# Altium PCB PocketAnalyser_R00.PcbDoc
Units mil, origin at the board's own origin, x right, y up, seen from the top; angles counter-clockwise.
Board outline 2915 x 965 mil, 2 copper layers (Top Layer, Bottom Layer); 36 components, 19 nets, 188 pads, 371 vias.
Unrouted connection lines stored in the file: 1.
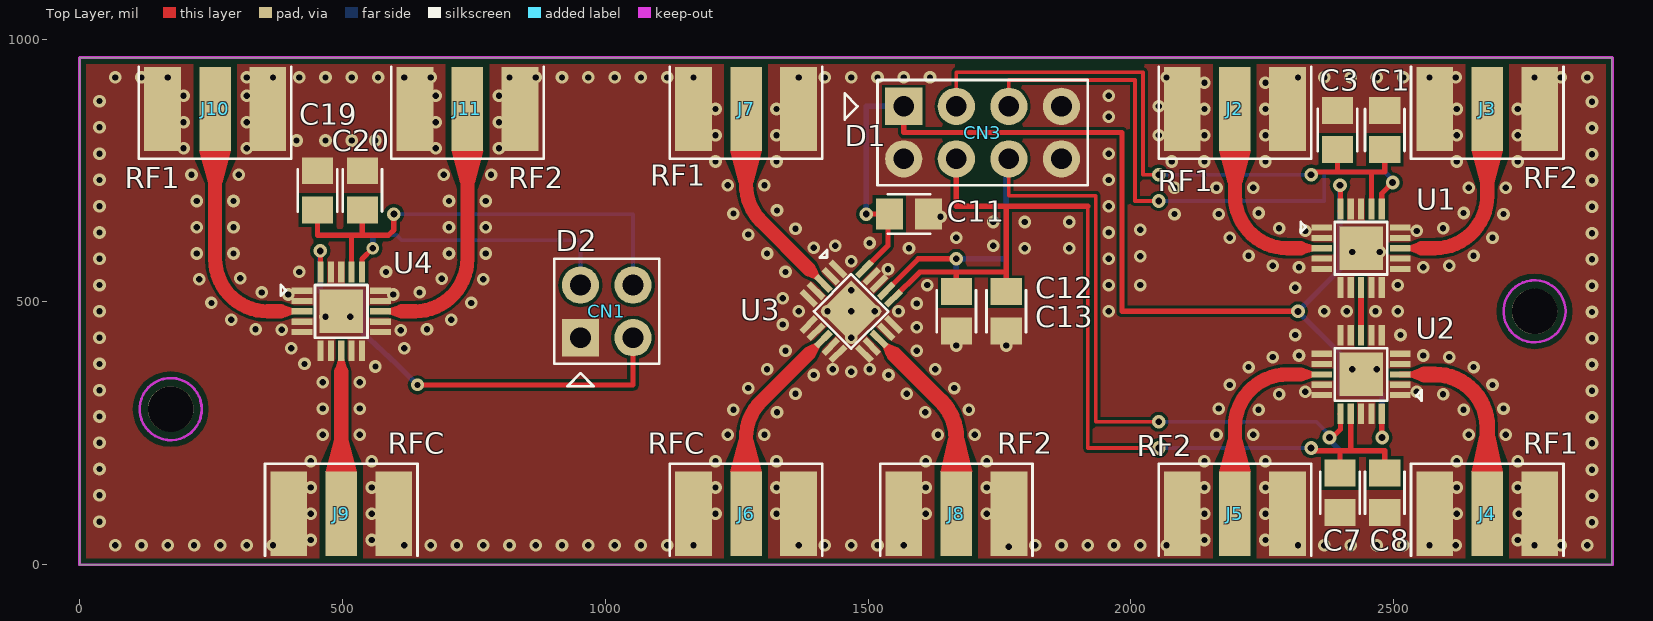
[diagram p0: Top Layer view]
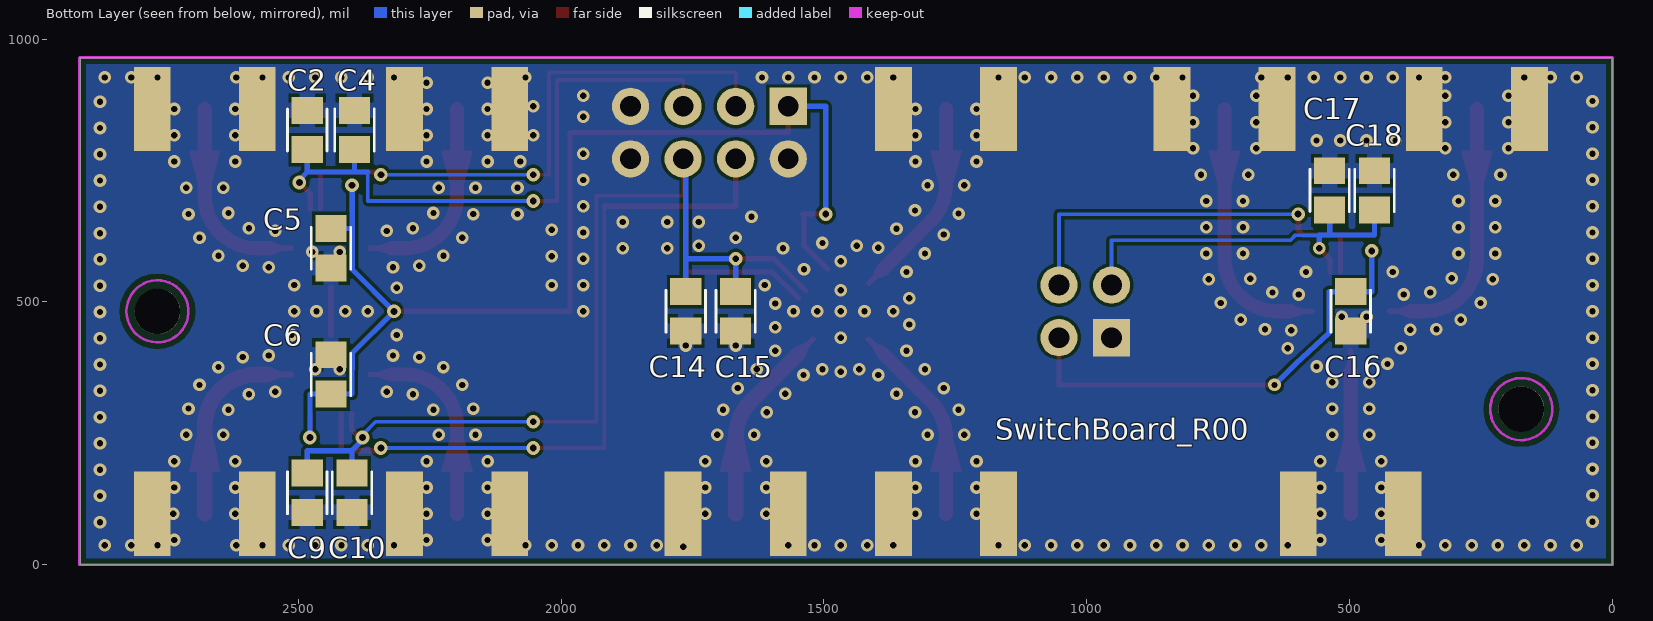
[diagram p1: Bottom Layer view, seen from below]
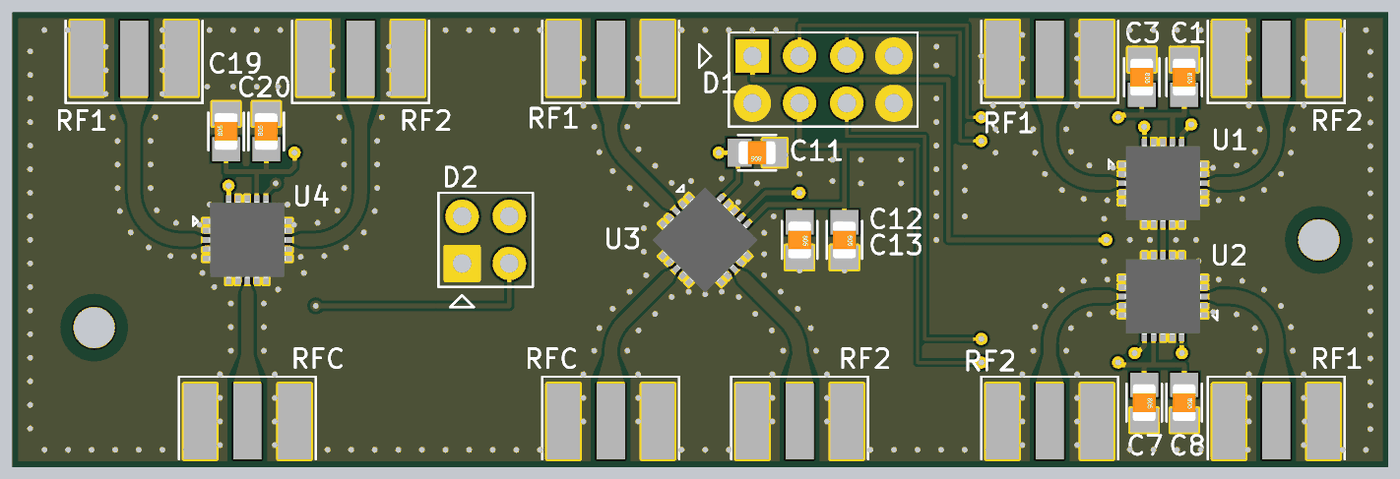
[diagram p2: 3D render of the assembled board from above, using the file's embedded part models]
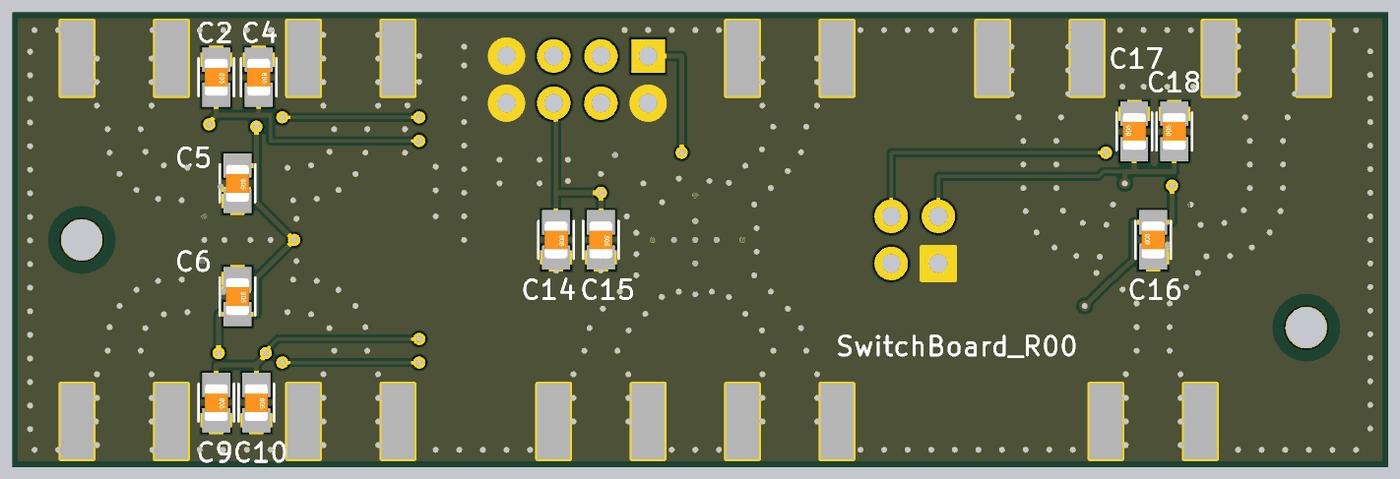
[diagram p3: 3D render of the assembled board from below, using the file's embedded part models]

## Layer stack, top to bottom
Top Solder: solder mask 0.4, Solder Resist, Dk 3.5
Top Layer: signal copper 1.4
Dielectric 1: dielectric 12.6, FR-4, Dk 4.8
Bottom Layer: signal copper 1.4
Bottom Solder: solder mask 0.4, Solder Resist, Dk 3.5

## Board outline
0,0 0,965 2915,965 2915,0

## Design rules (kind name [scope] priority, off if disabled: settings)
Clearance Clearance_3 [(HasFootprint('SMA_Connector') AND  Not InNet('GND'))] p1: gap=12 ignorepadtopadclearanceinfootprint=FALSE
Clearance TOPGND_RF_2 [InNamedPolygon('NONET_L01_P001')] p2: gap=6 ignorepadtopadclearanceinfootprint=FALSE
Clearance TOPGND_RF_1 [InNamedPolygon('NONET_L01_P001')] p3: gap=6 ignorepadtopadclearanceinfootprint=FALSE
Clearance Clearance_1 [InNamedPolygon('NONET_L01_P001')] p4: gap=6 ignorepadtopadclearanceinfootprint=FALSE
Clearance Clearance_1 [OnMid vs OnMid] p5: gap=6 ignorepadtopadclearanceinfootprint=FALSE sourcerule=43 cellrowname=All cellrowtype=0 cellcolname=All cellcoltype=0 innerlayers=TRUE
Clearance Clearance_2 [(ExistsOnLayer('Top Layer') Or ExistsOnLayer('Bottom Layer')) vs (ExistsOnLayer('Top Layer') Or ExistsOnLayer('Bottom Layer'))] p6: gap=6 ignorepadtopadclearanceinfootprint=FALSE sourcerule=43 cellrowname=All cellrowtype=0 cellcolname=All cellcoltype=0 outerlayers=TRUE
Clearance [All] p7: gap=10 ignorepadtopadclearanceinfootprint=FALSE ismatrix=TRUE
HoleSize [All] p1: absolutevalues=TRUE maxlimit=100 minlimit=12 maxpercent=80.000 minpercent=20.000
PolygonConnect TOPGND_RF [All vs IsNamedPolygon('TL_GND')] p1: connectstyle=Direct reliefconductorwidth=20 reliefentries=4 polygonreliefangle="90 Angle" airgapwidth=6
PolygonConnect [All] p2: thpad.connectstyle=Relief thpad.reliefconductorwidth=30 thpad.reliefentries=4 thpad.polygonreliefangle="90 Angle" thpad.airgapwidth=6 smdpad.connectstyle=Relief smdpad.reliefconductorwidth=30 smdpad.reliefentries=4 smdpad.polygonreliefangle="90 Angle" smdpad.airgapwidth=6 via.connectstyle=Direct via.reliefconductorwidth=10 via.reliefentries=4 via.polygonreliefangle="90 Angle" via.airgapwidth=10
RoutingVias RoutingViaStyle_1 [All] p1: holewidth=12 width=24 viastyle="Through Hole" minholewidth=12 minwidth=24 maxholewidth=16 maxwidth=32
RoutingVias [All] p2: holewidth=28 width=50 viastyle="Through Hole" minholewidth=28 minwidth=50 maxholewidth=28 maxwidth=50
SolderMaskExpansion [All] p1: expansion=4 istentingtop=FALSE
Width MaxMinWidth_3 [All] p1: maxlimit=100 minlimit=6 preferedwidth=10 minimp=50.000000 maximp=50.000000 favimp=50.000000
Width [All] p2: maxlimit=10 minlimit=10 preferedwidth=10
29 further rules are at their usual default settings.

## Classes and differential pairs
component class "Switch Board B": C11 C12 C13 C14 C15 C16 C17 C18 C19 C20 J6 J7 J8 J9 J10 J11 U3 U4
component class "Switch Board A": C1 C2 C3 C4 C5 C6 C7 C8 C9 C10 CN1 CN3 J2 J3 J4 J5 U1 U2

## Components (designator, comment, footprint, x,y, rotation, side; value= is the part's Value field where it differs from the comment)
C1 "200pF 16V C0G" C_0805 2482.95,827.13 r270 top
C2 "2x100pF 16V C0G" C_0805 2482.95,827.13 r270 bottom
C3 "2x100pF 16V C0G" C_0805 2392.95,827.13 r270 top
C4 "2x100pF 16V C0G" C_0805 2392.95,827.13 r270 bottom
C5 "0.1uF 16V X7R" C_0805 2437.95,602.13 r270 bottom
C6 "0.1uF 16V X7R" C_0805 2437.95,362.13 r270 bottom
C7 "2x100pF 16V C0G" C_0805 2397.95,137.13 r270 top
C8 "200pF 16V C0G" C_0805 2482.95,137.13 r270 top
C9 "2x100pF 16V C0G" C_0805 2482.95,137.13 r270 bottom
C10 "2x100pF 16V C0G" C_0805 2397.95,137.13 r270 bottom
C11 "0.1uF 16V X7R" C_0805 1577.95,667.13 r180 top
C12 "2x100pF 16V C0G" C_0805 1667.95,482.13 r270 top
C13 "200pF 16V C0G" C_0805 1762.95,482.13 r270 top
C14 "200pF 16V C0G" C_0805 1667.95,482.13 r270 bottom
C15 "2x100pF 16V C0G" C_0805 1762.95,482.13 r270 bottom
C16 "0.1uF 16V X7R" C_0805 497.95,482.13 r90 bottom
C17 "2x100pF 16V C0G" C_0805 537.95,712.13 r90 bottom
C18 "200pF 16V C0G" C_0805 452.95,712.13 r90 bottom
C19 "2x100pF 16V C0G" C_0805 452.95,712.13 r90 top
C20 "200pF 16V C0G" C_0805 537.95,712.13 r90 top
CN1 "CONN_04P" "Header_M_2x2_0.1\"" 1002.95,482.13 r90 top
CN3 "CONN_08P" "Header_M_2x4_0.1\"" 1717.95,822.13 r0 top
J2 "SMA_Connector" SMA_Connector 2197.95,867.13 r0 top locked
J3 "SMA_Connector" SMA_Connector 2677.95,867.13 r0 top
J4 "SMA_Connector" SMA_Connector 2677.95,97.13 r180 top
J5 "SMA_Connector" SMA_Connector 2197.95,97.13 r180 top
J6 "SMA_Connector" SMA_Connector 1267.95,97.13 r180 top
J7 "SMA_Connector" SMA_Connector 1267.95,867.13 r0 top
J8 "SMA_Connector" SMA_Connector 1667.95,97.13 r180 top
J9 "SMA_Connector" SMA_Connector 497.95,97.13 r180 top
J10 "SMA_Connector" SMA_Connector 257.95,867.13 r0 top
J11 "SMA_Connector" SMA_Connector 737.95,867.13 r0 top
U1 "QPC6324" QFN50P400X400X90-21N-D 2437.95,602.13 r0 top
U2 "QPC6324" QFN50P400X400X90-21N-D 2437.95,362.13 r180 top
U3 "QPC6324" QFN50P400X400X90-21N-D 1467.95,482.13 r315 top
U4 "QPC6324" QFN50P400X400X90-21N-D 497.95,482.13 r0 top

## Footprints (in the part's own frame and the unit in brackets; to place one, negate y for a bottom-side part, rotate by r counter-clockwise, add the part's x,y. Pads: shape width x height; smd on the part's side, far side on the other; paste and mask are expansions set on the pad)
C_0805 [mm] "Chip Capacitor, 2-Leads, Body 2.00x1.25mm"
  rect 1.3x1.5 smd: 1(-0.95,0) 2(0.95,0)
  silkscreen extent -1.02,-0.95 1.02,0.95, body extent -1,-0.62 1,0.63, height 0.78
"Header_M_2x2_0.1\"" [mm] "Header Male 2 x 2 Vias Pitch 100mils"
  rect 1.8x1.8 hole 1: 1(-1.27,1.27)
  round 1.8 hole 1: 2(-1.27,-1.27) 3(1.27,1.27) 4(1.27,-1.27)
  silkscreen extent -3.62,-2.54 2.54,2.54
"Header_M_2x4_0.1\"" [mm] "Header Male 2 x 4 Vias Pitch 100mils"
  rect 1.8x1.8 hole 1: 1(-3.81,1.27)
  round 1.8 hole 1: 2(-3.81,-1.27) 3(-1.27,1.27) 4(-1.27,-1.27) 5(1.27,1.27) 6(1.27,-1.27) 7(3.81,1.27) 8(3.81,-1.27)
  silkscreen extent -6.67,-2.54 5.08,2.54
QFN50P400X400X90-21N-D [mm]
  rect 1x0.3 smd: 1(-1.9,1) 2(-1.9,0.5) 3(-1.9,0) 4(-1.9,-0.5) 5(-1.9,-1) 11(1.9,-1) 12(1.9,-0.5) 13(1.9,0) 14(1.9,0.5) 15(1.9,1)
  rect 0.3x1 smd: 6(-1,-1.9) 7(-0.5,-1.9) 8(0,-1.9) 9(0.5,-1.9) 10(1,-1.9) 16(1,1.9) 17(0.5,1.9) 18(0,1.9) 19(-0.5,1.9) 20(-1,1.9)
  rect 2.1x2.1 smd: 21(0,0)
  silkscreen extent -2.92,-1.27 1.27,1.27, body extent -2.05,-2.05 2.05,2.05, height 0.9
SMA_Connector [mil] "SMA PCB Connector 1.6mm / PN: EMPCB.CSMAFSTJ.A"
  rect 60x160 smd: 1(0,0)
  rect 70x160 smd: 2(-100,0) 2(100,0)
  rect 70x160 smd far side: 2(-100,0) 2(100,0)
  silkscreen extent -145,-95 145,80, body extent -121,-60 121,80, height 10

## Part data
C1 C2 C3 C4 C5 C6 C7 C8 C9 C10 C11 C12 C13 C14 C15 C16 C17 C18 C19 C20: library part "Ceramic Cap"
CN1: "Connector Generic 4 Vias"
CN3: "Connector Generic 8 Vias"
J2 J3 J4 J5 J6 J7 J8 J9 J10 J11: "Connector SMA"
U1 U2 U3 U4: "SPDT RF Switch"

## Free pads (board coordinates)
  round 86.61 hole 86.61: 4(173.47,296.15) 4(2767.95,482.13)

## Via types
v1: diameter 24, hole 12, Top Layer to Bottom Layer, tented both sides, 355 vias
v2: diameter 26, hole 13, Top Layer to Bottom Layer, 15 vias
v3: diameter 24, hole 12, Top Layer to Bottom Layer, 1 vias

## Nets (pads, with @x,y where several pads share a name; then routed paths per layer and width w, separated by ;. In a path a pad name is that pad's centre, name@x,y a point inside that pad or via, vN(x,y) a via of type N, cw(c..) or ccw(c..) an arc to the next point about the centre after c; other vN are vias at no path point)
+5V: C5.1 C6.2 C11.2 C16.2 CN1.2 CN3.1 U1.20 U2.20 U3.20 U4.20 | length 3287.9
  Top Layer w10: v2(457.95,597.13) 458.58,596.5 U4.20 ; v1(642.95,342.13) 1052.95,342.13 CN1.2 ; U3.20 1537.95,607.13 C11.2@1537.95,667.13 ; v2(1496.74,667.13) C11.2@1537.95,667.13 ; C11.2 C11.2@1537.95,667.13 ; CN3.1@1567.95,882.13 CN3.1 1567.95,822.13 1982.95,822.13 1982.95,482.13 v2(2317.95,482.13) ; U1.20@2397.68,672.13 U1.20 2398.58,722.13 v2(2397.95,722.13) ; U2.20 2477.32,237.13 v2@2477.95,237.13
  Bottom Layer w10: v2(457.95,597.13) 457.95,519.53 C16.2 539.48,519.53 539.48,440.72 602.95,382.13 v1(642.95,342.13) ; v2(1496.74,667.13) 1496.74,872.13 CN3.1 ; v2(2317.95,482.13) v2@2318.07,482.13 ; v2(2397.95,722.13) 2397.43,721.6 2397.43,639 ; C5.1 2397.95,639.53 2397.43,639 ; v2@2477.95,237.13 2477.95,324.72 C6.2 2397.95,324.72 2397.95,327.13 2397.64,371.78 cw(c2408.43,373.94) 2397.43,373.94 2397.43,402.78 v2@2318.07,482.13 ; v2(2317.95,482.13) 2397.43,561.51 2397.43,639
  other v2: 2477.95,242.13
CTRL1_CPLOUT: C1.2 C3.2 CN3.3 U1.17 | length 1220.7
  Top Layer w7: CN3.3@1667.95,882.13 1667.95,937.13 2022.95,937.13 2022.95,742.13 v2(2052.95,742.13)
  Top Layer w10: v2@2342.95,747.13 2392.95,747.13 ; C3.2 2392.95,747.13 ; U1.17 2457.95,676.93 2457.95,747.13 ; C1.2 2482.95,747.13 2457.95,747.13 ; 2392.95,747.13 2457.95,747.13
  Bottom Layer w7: v2(2052.95,742.13) v2(2342.95,742.13)
CTRL1_MSR: C7.1 C8.1 C12.1 C13.1 CN3.4 U2.17 U3.16 | length 1968.1
  Top Layer w7: 1917.95,682.13 1917.95,227.13 1917.95,222.13 v2(2052.95,222.13)
  Top Layer w10: U3.16 1598.63,557.13 1667.95,557.13 ; C12.1 1667.95,557.13 ; CN3.4@1667.95,782.13 1667.95,682.13 1762.95,682.13 ; C13.1 1762.95,557.13 ; 1917.95,682.13 1762.95,682.13 ; v2(2342.95,222.13) 2347.95,217.13 2397.95,217.13 ; C7.1 2397.95,217.13 ; U2.17@2417.95,287.01 U2.17 2418.27,217.13 ; C8.1 2482.95,217.13 2418.27,217.13 ; 1667.95,557.13 1762.95,557.13 ; 1762.95,557.13 1762.95,682.13 ; 2397.95,217.13 2418.27,217.13
  Bottom Layer w7: v2(2052.95,222.13) v2(2342.95,222.13)
CTRL2_CPLOUT: C2.2 C4.2 CN3.5 U1.16 | length 1220.2
  Top Layer w7: CN3.5 1767.95,922.13 2007.95,922.13 2007.95,692.13 v2(2052.95,692.13)
  Top Layer w10: U1.16 2477.32,706.5 v2(2497.95,727.13)
  Bottom Layer w7: v2(2052.95,692.13) 2367.95,692.13 2367.95,747.13
  Bottom Layer w10: 2367.95,747.13 2392.95,747.13 ; C4.2 2392.95,747.13 ; C2.2 2482.95,747.13 ; v2(2497.95,727.13) 2497.95,732.13 2482.95,747.13 ; 2392.95,747.13 2482.95,747.13
CTRL2_MSR: C9.1 C10.1 C14.1 C15.1 CN3.6 U2.16 U3.17 | length 1980.1
  Top Layer w7: CN3.6@1767.95,782.13 1767.95,702.13 1932.95,702.13 1932.95,272.13 v2(2052.95,272.13)
  Top Layer w10: U3.17 1595.79,582.13 v2(1667.95,582.13) ; v2(2377.95,242.13) 2382.95,242.13 2398.58,257.76 U2.16 U2.16@2397.95,286.69
  Bottom Layer w7: v2(2052.95,272.13) 2352.95,272.13 v2@2377.95,247.13
  Bottom Layer w10: C14.1 v2(1667.95,582.13) 1762.95,582.13 ; C15.1 1762.95,582.13 ; CN3.6@1767.95,782.13 1762.95,782.13 1762.95,582.13 ; v2@2377.95,247.13 v2(2377.95,242.13) 2377.95,237.13 2397.95,217.13 ; C10.1 2397.95,217.13 ; C9.1 2482.95,217.13 2397.95,217.13
GND: C1.1 C2.1 C3.1 C4.1 C5.2 C6.1 C7.2 C8.2 C9.2 C10.2 C11.1 C12.2 C13.2 C14.2 C15.2 C16.1 C17.2 C18.2 C19.2 C20.2 CN1.1 CN3.2 CN3.7 CN3.8 J2.2 J3.2 J4.2 J5.2 J6.2 J7.2 J8.2 J9.2 J10.2 J11.2 U1.1 U1.2 U1.4 U1.5 U1.6 U1.7 U1.9 U1.10 U1.11 U1.12 U1.14 U1.15 U1.18 U1.19 U1.21 U2.1 U2.2 U2.4 U2.5 U2.6 U2.7 U2.9 U2.10 U2.11 U2.12 U2.14 U2.15 U2.18 U2.19 U2.21 U3.1 U3.2 U3.4 U3.5 U3.6 U3.7 U3.9 U3.10 U3.11 U3.12 U3.14 U3.15 U3.18 U3.19 U3.21 U4.1 U4.2 U4.4 U4.5 U4.6 U4.7 U4.9 U4.10 U4.11 U4.12 U4.14 U4.15 U4.18 U4.19 U4.21
  other v1: 1767.95,34.19 67.95,37.13 117.95,37.13 167.95,37.13 217.95,37.13 267.95,37.13 317.95,37.13 367.95,37.13 617.95,37.13 667.95,37.13 717.95,37.13 767.95,37.13 817.95,37.13 867.95,37.13 917.95,37.13 967.95,37.13 1017.95,37.13 1067.95,37.13 1117.95,37.13 1167.95,37.13 1367.95,37.13 1417.95,37.13 1467.95,37.13 1517.95,37.13 1567.95,37.13 1817.95,37.13 1867.95,37.13 1917.95,37.13 1967.95,37.13 2017.95,37.13 2067.95,37.13 2317.95,37.13 2367.95,37.13 2417.95,37.13 2467.95,37.13 2517.95,37.13 2567.95,37.13 2617.95,37.13 2767.95,37.13 2817.95,37.13 2867.95,37.13 439.95,47.13 555.95,47.13 2139.95,47.13 2255.95,47.13 2735.95,47.13 2877.32,80.97 37.95,82.13 439.95,97.13 555.95,97.13 1209.95,97.13 1325.95,97.13 1609.95,97.13 1725.95,97.13 2139.95,97.13 2255.95,97.13 2619.95,97.13 2737.95,97.13 2877.32,130.97 37.95,132.13 439.95,147.13 555.95,147.13 1209.95,147.13 1325.95,147.13 1609.95,147.13 1725.95,147.13 2139.95,147.13 2255.95,147.13 2619.95,147.13 2735.95,147.13 2877.32,180.97 37.95,182.13 439.95,197.13 555.95,197.13 1209.95,197.13 1325.95,197.13 1609.95,197.13 1725.95,197.13 2139.95,197.13 2255.95,197.13 2619.95,197.13 2735.95,197.13 2877.32,230.97 37.95,232.13 462.95,247.13 532.95,247.13 1232.95,247.13 1302.95,247.13 1632.95,247.13 1702.95,247.13 2162.95,247.13 2232.95,247.13 2642.95,247.13 2712.95,247.13 2877.32,280.97 37.95,282.13 1326.95,290.13 1608.95,290.13 1243.95,295.13 1691.95,295.13 2242.95,295.13 2632.95,295.13 462.95,297.13 532.95,297.13 2166.95,297.13 2708.95,297.13 2281.95,324.13 2593.95,324.13 1361.95,325.13 1573.95,325.13 2331.95,329.13 2543.95,329.13 2877.32,330.97 37.95,332.13 1271.95,336.13 1663.95,336.13 2187.95,342.13 2687.95,342.13 462.95,347.13 532.95,347.13 1396.95,361.13 1538.95,361.13 1467.95,367.13 1307.95,372.13 1432.95,372.13 1502.95,372.13 1627.95,372.13 2420.95,372.13 2467.95,372.13 2223.95,376.13 2651.95,376.13 562.95,377.13 2877.32,380.97 37.95,382.13 427.95,382.13 2269.95,395.13 2605.95,395.13 2319.95,398.13 2555.95,398.13 1342.95,407.13 1592.95,407.13 402.95,412.13 617.95,412.13 1667.95,417.13 1762.95,417.13 2877.32,430.97 37.95,432.13 1467.95,432.13 2312.95,437.13 2512.95,437.13 610.95,446.13 384.95,447.13 334.95,448.13 660.95,448.13 1592.95,452.13 1337.95,457.13 288.95,466.13 706.95,466.13 467.95,472.13 514.95,472.13 2877.32,480.97 37.95,482.13 1367.95,482.13 1422.95,482.13 1467.95,482.13 1512.95,482.13 1557.95,482.13 1957.95,482.13 2367.95,482.13 2410.45,482.13 2465.45,482.13 2507.95,482.13 1592.95,497.13 250.95,498.13 744.95,498.13 1337.95,507.13 396.95,514.13 596.95,514.13 346.95,518.13 646.95,518.13 1467.95,522.13 2312.95,527.13 2877.32,530.97 37.95,532.13 1612.95,532.13 1957.95,532.13 2017.95,532.13 2507.95,532.13 227.95,543.13 767.95,543.13 688.95,544.13 305.95,545.13 417.95,557.13 582.95,557.13 1342.95,557.13 1537.95,562.13 2319.95,566.13 2555.95,566.13 2269.95,569.13 2605.95,569.13 1467.95,577.13 2877.32,580.97 37.95,582.13 1957.95,582.13 2017.95,587.13 2223.95,588.13 2651.95,588.13 222.95,592.13 292.95,592.13 702.95,592.13 772.95,592.13 1307.95,592.13 2420.95,595.13 2473.48,595.13 1577.95,602.13 1797.95,602.13 1882.95,602.13 1396.95,603.13 1437.95,607.13 1737.95,607.13 1502.95,612.13 1667.95,622.13 2187.95,622.13 2687.95,622.13 1271.95,628.13 2877.32,630.97 37.95,632.13 1957.95,632.13 2331.95,635.13 2543.95,635.13 2017.95,637.13 1361.95,639.13 2281.95,640.13 2593.95,640.13 222.95,642.13 292.95,642.13 702.95,642.13 772.95,642.13 1737.95,652.13 1797.95,652.13 1882.95,652.13 1637.95,662.13 2082.95,667.13 2166.95,667.13 2708.95,667.13 1243.95,668.13 2242.95,669.13 2632.95,669.13 1326.95,674.13 2877.32,680.97 37.95,682.13 1957.95,682.13 222.95,692.13 292.95,692.13 702.95,692.13 772.95,692.13 2082.95,717.13 2162.95,717.13 2232.95,717.13 2642.95,717.13 2712.95,717.13 1232.95,722.13 1302.95,722.13 2877.32,730.97 37.95,732.13 1957.95,732.13 212.95,742.13 302.95,742.13 692.95,742.13 782.95,742.13 1209.95,767.13 1325.95,767.13 2077.95,767.13 2139.95,767.13 2255.95,767.13 2619.95,767.13 2735.95,767.13 2877.32,780.97 37.95,782.13 1957.95,782.13 197.95,792.13 317.95,792.13 677.95,792.13 797.95,792.13 412.95,807.13 467.95,807.13 517.95,807.13 562.95,807.13 1209.95,817.13 1325.95,817.13 2052.95,817.13 2139.95,817.13 2255.95,817.13 2619.95,817.13 2735.95,817.13 2877.32,830.97 37.95,832.13 197.95,842.13 317.95,842.13 677.95,842.13 797.95,842.13 1957.95,852.13 1209.95,867.13 1325.95,867.13 2139.95,867.13 2255.95,867.13 2619.95,867.13 2735.95,867.13 2052.95,872.13 2877.32,880.97 37.95,882.13 197.95,892.13 317.95,892.13 677.95,892.13 797.95,892.13 1957.95,892.13 2139.95,917.13 2255.95,917.13 67.95,927.13 117.95,927.13 167.95,927.13 317.95,927.13 367.95,927.13 417.95,927.13 467.95,927.13 517.95,927.13 567.95,927.13 617.95,927.13 667.95,927.13 817.95,927.13 867.95,927.13 917.95,927.13 967.95,927.13 1017.95,927.13 1067.95,927.13 1117.95,927.13 1167.95,927.13 1367.95,927.13 1417.95,927.13 1467.95,927.13 1517.95,927.13 1567.95,927.13 1617.95,927.13 2067.95,927.13 2317.95,927.13 2367.95,927.13 2417.95,927.13 2467.95,927.13 2517.95,927.13 2567.95,927.13 2617.95,927.13 2767.95,927.13 2817.95,927.13 2867.95,927.13
NetC17_1: C17.1 C18.1 CN1.3 U4.16 | length 763.1
  Top Layer w10: U4.16 537.32,581.5 v3(557.95,602.12)
  Bottom Layer w7: 557.95,627.13 602.95,627.13 612.95,617.13 952.95,617.13 CN1.3
  Bottom Layer w10: C18.1 452.95,627.13 537.95,627.13 ; C17.1 537.95,627.13 ; v3(557.95,602.12) 557.95,627.13 537.95,627.13
NetC19_1: C19.1 C20.1 CN1.4 U4.17 | length 915.1
  Top Layer w10: C19.1@452.95,664.72 452.95,626.81 517.64,626.81 ; U4.17 517.64,626.81 ; C20.1@537.95,664.72 537.95,627.13 537.64,626.81 ; v2(597.95,667.13) 597.95,637.13 587.64,626.81 537.64,626.81 ; 517.64,626.81 537.64,626.81
  Bottom Layer w7: v2(597.95,667.13) 1052.95,667.13 CN1.4
NetJ2_1: J2.1 U1.3 | length 387.3
  Top Layer w11: 2322.95,602.13 U1.3
  Top Layer w27: J2.1 2197.95,702.13 ccw(c2297.95,702.13) 2297.95,602.13 2322.95,602.13
NetJ3_1: J3.1 U1.13 | length 387.3
  Top Layer w10: U1.13 2552.95,602.13
  Top Layer w27: 2552.95,602.13 2577.95,602.13 ccw(c2577.95,702.13) 2677.95,702.13 J3.1
NetJ4_1: J4.1 U2.3 | length 387.3
  Top Layer w11: U2.3 2557.95,362.13
  Top Layer w30: 2557.95,362.13 2577.95,362.13 cw(c2577.95,262.13) 2677.95,262.13 J4.1
NetJ5_1: J5.1 U2.13 | length 387.3
  Top Layer w10: 2322.95,362.13 U2.13
  Top Layer w27: J5.1 2197.95,262.13 cw(c2297.95,262.13) 2297.95,362.13 2322.95,362.13
NetJ6_1: J6.1 U3.8 | length 388.9
  Top Layer w11: 1387.95,402.13 U3.8
  Top Layer w27: J6.1 1267.95,242.13 cw(c1364.52,242.13) 1296.24,310.41 1387.95,402.13
NetJ7_1: J7.1 U3.3 | length 388.7
  Top Layer w10: 1387.95,562.13 U3.3
  Top Layer w27: J7.1 1267.95,723.55 ccw(c1367.95,723.55) 1297.24,652.84 1387.95,562.13
NetJ8_1: J8.1 U3.13 | length 390.2
  Top Layer w11: U3.13 1549.95,400.13
  Top Layer w30: 1549.95,400.13 1639.67,310.41 ; 1638.66,311.42 cw(c1567.95,240.7) 1667.95,240.7 J8.1
NetJ9_1: J9.1 U4.8 | length 310.2
  Top Layer w11: 497.95,367.13 U4.8
  Top Layer w27: J9.1 497.95,367.13
NetJ10_1: J10.1 U4.3 | length 507.3
  Top Layer w11: 382.95,482.13 U4.3
  Top Layer w27: J10.1 257.95,582.13 ccw(c357.95,582.13) 357.95,482.13 382.95,482.13
NetJ11_1: J11.1 U4.13 | length 507.3
  Top Layer w11: U4.13 612.95,482.13
  Top Layer w27: 612.95,482.13 637.95,482.13 ccw(c637.95,582.13) 737.95,582.13 J11.1
NetU1_8: U1.8 U2.8 | length 90.4
  Top Layer w11: U2.8 U1.8

## Polygon pours and split planes (outlines as drawn)
GND on Bottom Layer "GND_L02_P000" (solid, pour order 0): 0,0 2915,0 2915,965 0,960
GND on Top Layer "TL_GND" (solid, remove dead copper, pour order 45): 0,0 2915,0 2915,965 0,965

## Keep-outs
Keep-Out Layer:
  circle w5: c173.47,296.15 r59.06
  circle w5: c2767.95,482.13 r59.06
  lines w5: 0,0 2916.22,0 2916.22,965 0,965 0,0

## Other copper
Top Layer:
  pour cut-out: 759.36,718.66 779.95,775.13 771.81,775.13
  pour cut-out: 695.95,775.13 716.54,718.66 704.09,775.13
  pour cut-out: 2635.95,775.13 2656.54,718.66 2638.59,775.13
  pour cut-out: 2217.83,725.22 2239.95,775.13 2237.18,775.13
  pour cut-out: 2635.95,189.13 2638.59,189.13 2656.54,245.59
  pour cut-out: 2699.36,245.59 2717.32,189.13 2719.95,189.13
  pour cut-out: 2217.83,239.03 2237.18,189.13 2239.95,189.13
  pour cut-out: 2155.95,189.13 2158.73,189.13 2178.07,239.03
  pour cut-out: 1225.95,189.13 1234.61,189.13 1248.07,239.03
  pour cut-out: 1287.83,239.03 1301.29,189.13 1309.95,189.13
  pour cut-out: 1689.2,242.29 1701.67,189.13 1709.95,189.13
  pour cut-out: 1625.95,189.13 1634.23,189.13 1646.68,242.25
  pour cut-out: 455.95,189.13 464.61,189.13 478.07,239.03
  pour cut-out: 517.83,239.03 531.29,189.13 539.95,189.13
  pour cut-out: 277.83,725.22 299.95,775.13 291.29,775.13
  pour cut-out: 215.95,775.13 238.07,725.22 224.61,775.13
  pour cut-out: 1225.95,775.13 1248.07,725.22 1234.61,775.13
  pour cut-out: 1287.83,725.22 1309.95,775.13 1301.29,775.13
  pour cut-out: 2155.95,775.13 2178.07,725.22 2158.73,775.13
  pour cut-out: 2699.36,718.66 2719.95,775.13 2717.32,775.13
  pour cut-out: 2699.36,245.59 2712.25,187.13 2717.95,187.13
  pour cut-out: 2637.95,187.13 2643.65,187.13 2656.54,245.59
  pour cut-out: 2217.83,239.03 2231.83,187.13 2237.95,187.13
  pour cut-out: 2157.95,187.13 2164.08,187.13 2178.07,239.03
  pour cut-out: 2157.95,777.13 2178.07,725.22 2164.08,777.13
  pour cut-out: 2217.83,725.22 2237.95,777.13 2231.83,777.13
  pour cut-out: 2699.36,718.66 2717.95,777.13 2712.25,777.13
  pour cut-out: 2637.95,777.13 2656.54,718.66 2643.65,777.13

## Silkscreen, mask and mechanical layers (free items; w line width, h text height)
Top Overlay:
  text "D1" at 1456,796 h40
  text "RF1" at 1086,721 h40
  text "RF1" at 86,716 h40
  text "RF2" at 816,716 h40
  text "RF2" at 2746,716 h40
  text "RF1" at 2051,711 h40
  text "D2" at 906,596 h40
  text "RFC" at 586,211 h40
  text "RFC" at 1081,211 h40
  text "RF2" at 1746,211 h40
  text "RF1" at 2746,211 h40
  text "RF2" at 2011,206 h40
Bottom Overlay:
  text "SwitchBoard_R00" at 1174,237.66 h40
Mechanical 1:
  the board outline again, w10
Mechanical 12 (Mech12):
  lines w0.01: 90,82.13 2845.91,82.13 ; 90,182.13 2845.91,182.13 ; 90,282.13 2845.91,282.13 ; 90,382.13 2845.91,382.13 ; 90,482.13 2845.91,482.13 ; 90,582.13 2845.91,582.13 ; 90,682.13 2845.91,682.13 ; 90,782.13 2845.91,782.13 ; 90,882.13 2845.91,882.13 ; 217.95,-10 217.95,974.25 ; 467.95,-11.47 467.95,972.78 ; 717.95,-10 717.95,974.25 ; 973.38,-18.68 973.38,965.58 ; 1217.95,-10 1217.95,974.25 ; 1467.95,-10 1467.95,974.25 ; 1717.95,-10 1717.95,974.25 ; 1967.95,-10 1967.95,974.25 ; 2217.95,-10 2217.95,974.25 ; 2467.95,-10 2467.95,974.25 ; 2717.95,-10 2717.95,974.25
  lines w5: -55,455 -55,515 -25,485 -55,455

## Dimensions
0,965 to 2915,965 on Mechanical 12 (Mech12)
0,965 to 0,0 on Mechanical 12 (Mech12)